# EAGLE board schematic (EAGLE 8.7.1), part 1 of 2
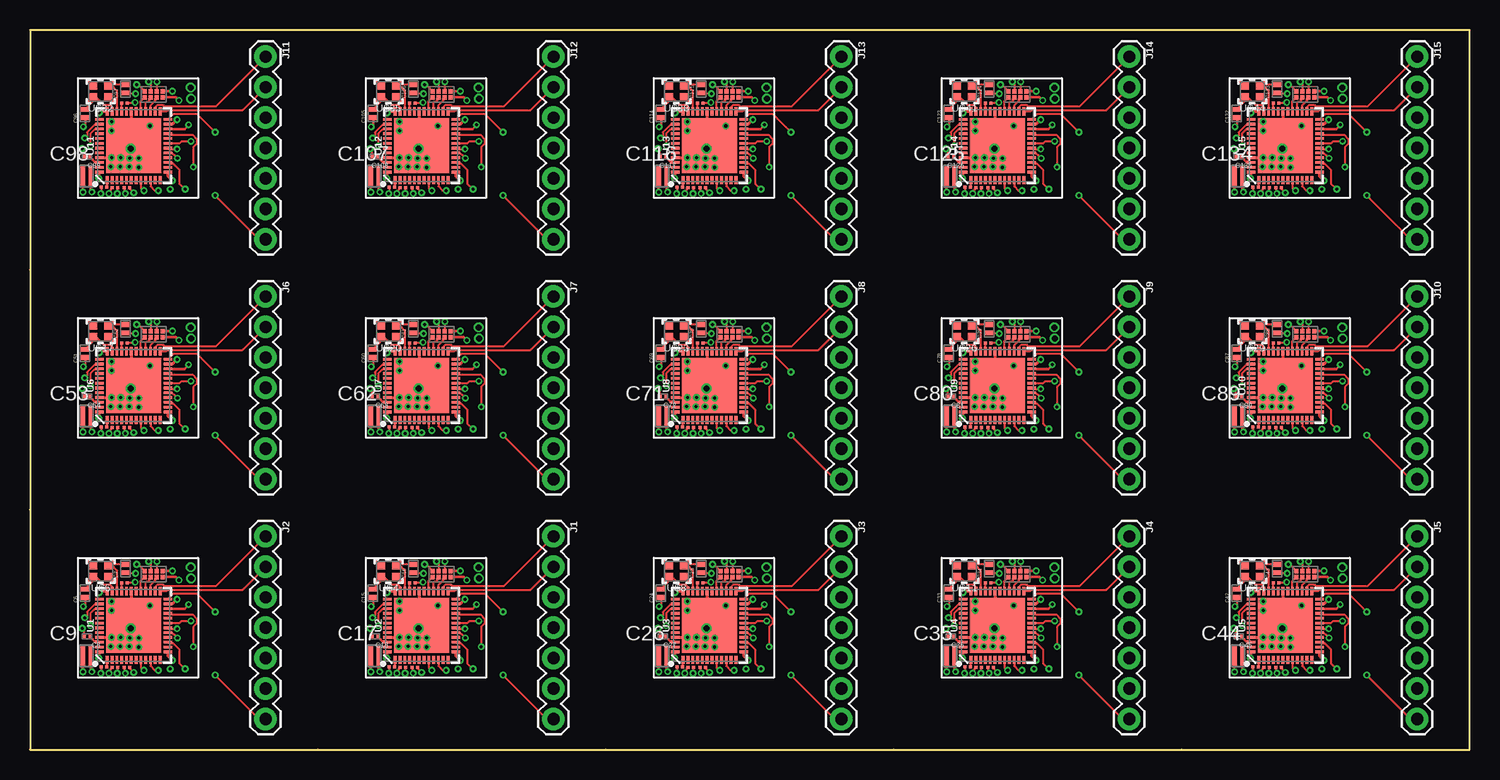
[diagram p0: board, top side]
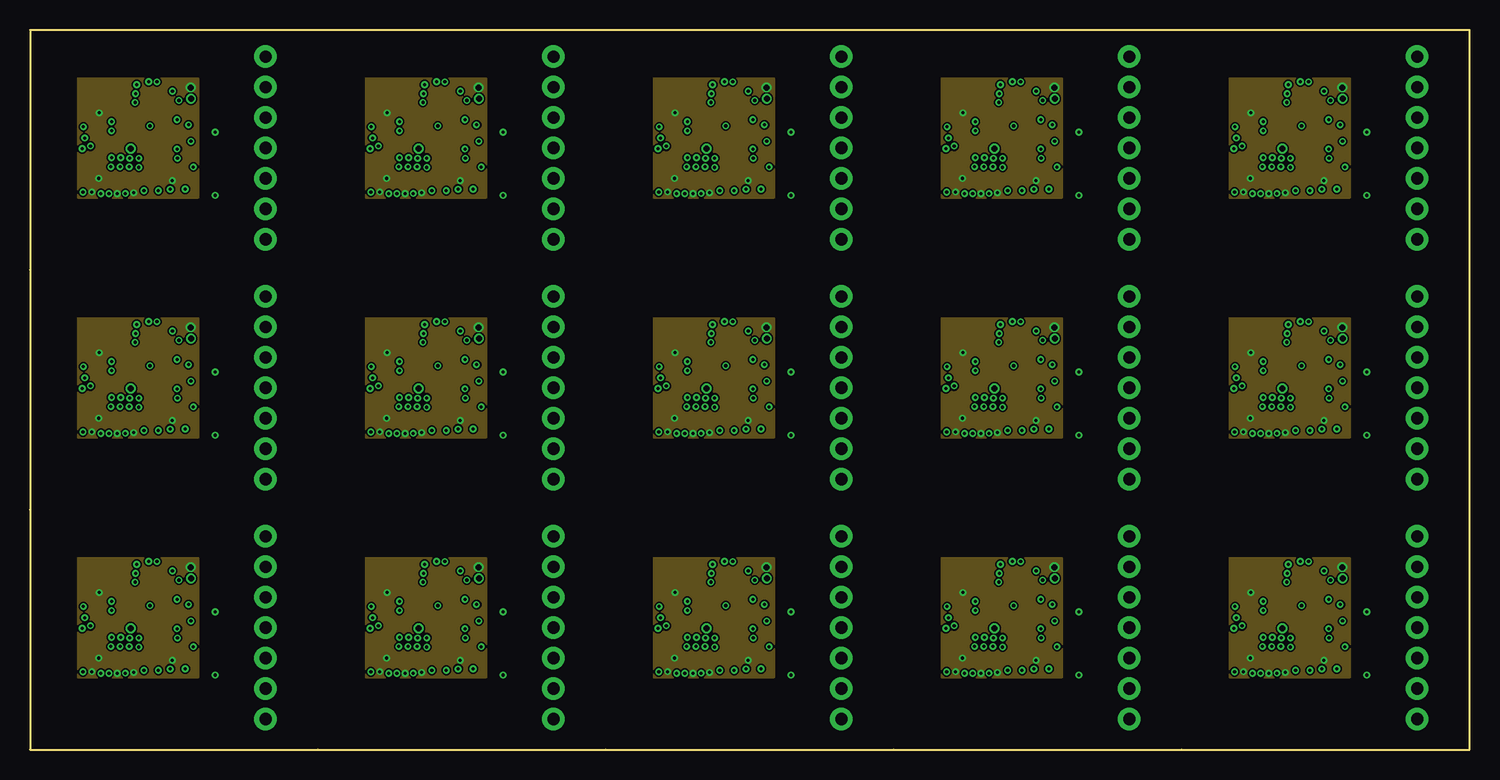
[diagram p1: board, inner layer Route8]
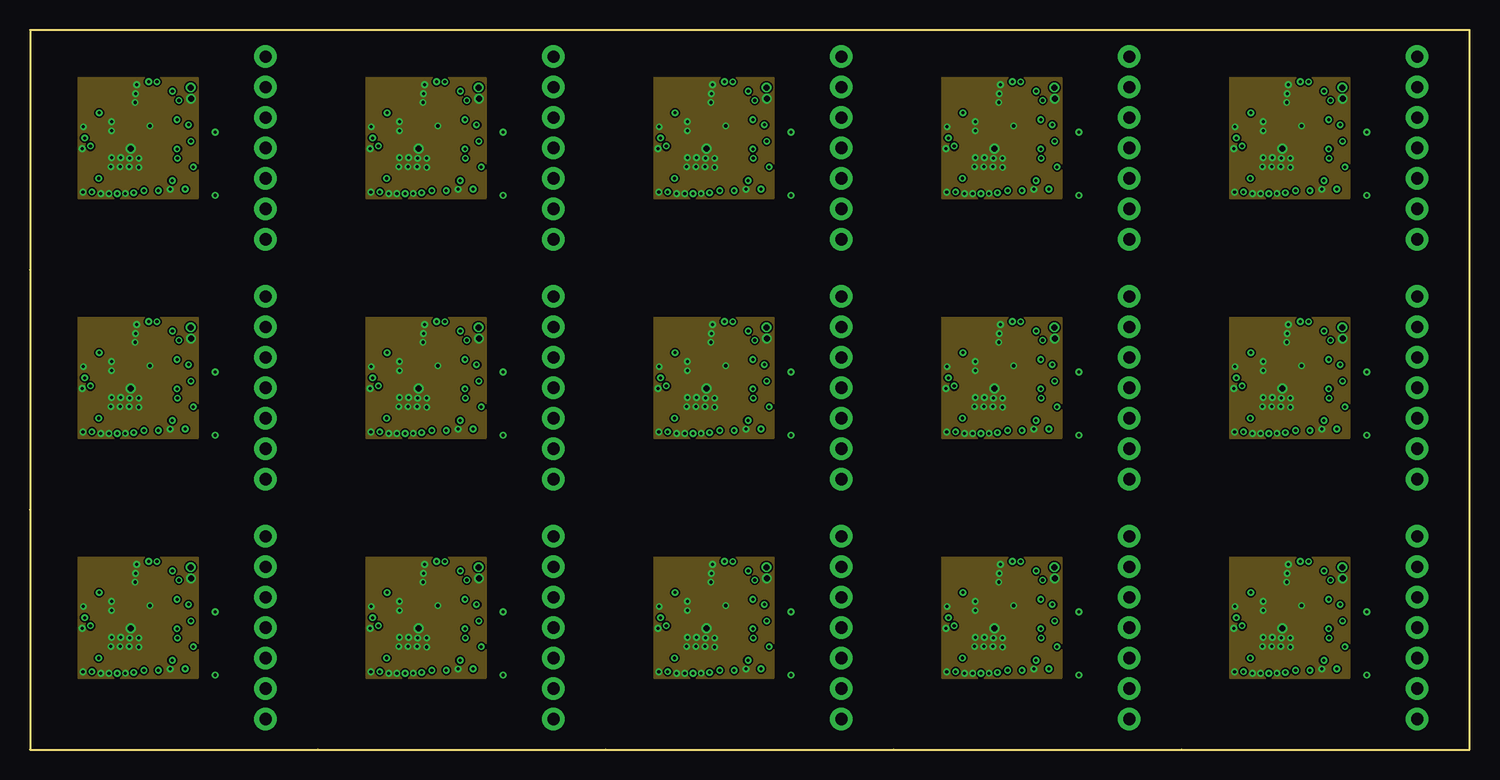
[diagram p2: board, inner layer Route10]
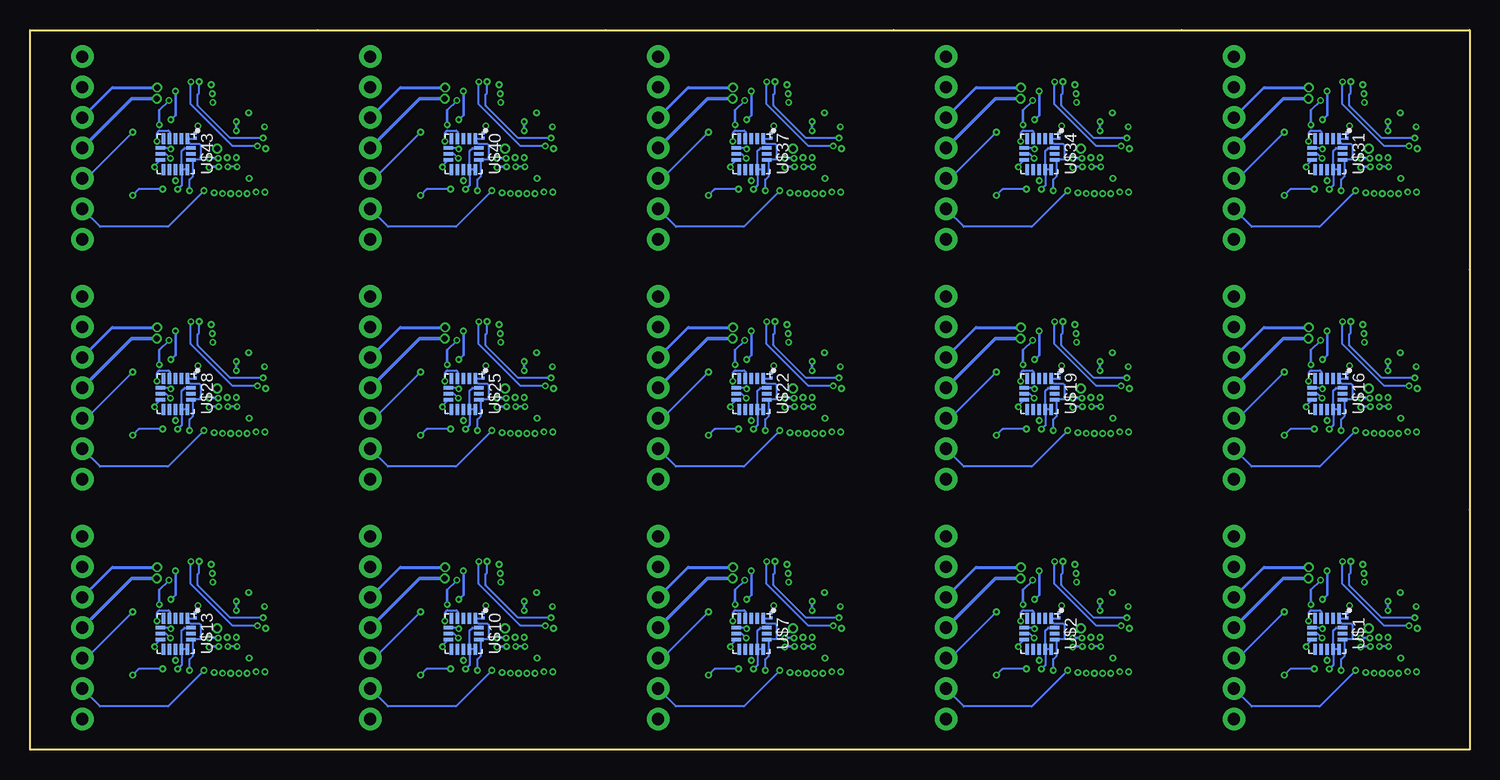
[diagram p3: board, bottom side, seen from below]

Size 120 x 60 mm. Coordinates in mm from the lower left corner, seen from the top.
Outline: 0,0 24,0 48,0 72,0 96,0 120,0 120,20 120,40 120,60 96,60 72,60 48,60 24,60 0,60 0,40 0,20 0,0
Copper layers (1*8*10*16): Top 0.035mm / dielectric 0.42mm / Route8 0.035mm / dielectric 0.62mm / Route10 0.035mm / dielectric 0.42mm / Bottom 0.035mm
Design rules "default *": minimum track width 6mil, minimum drill 10mil, track to track 5mil, track to pad 5mil, pad to pad 5mil, via to via 5mil, smd to smd 2mil, copper to edge 40mil, drill to drill 6mil, minimum pad ring 10mil, minimum via ring 6mil, stop-mask expansion 4mil, vias tented up to drill 0mil, thermal gap 10mil

## Footprints (pad centres in the part's own frame; a part is rotated, then mirrored left to right if it is on the bottom)
CAP_0402-L = smd 0.25 x 0.25: 1 -0.229,0; 2 0.229,0
CAPC1005X55N = smd 0.4 x 0.6: 1 -0.4,0; 2 0.3,0
CAPC0502X28N = smd 0.25 x 0.3: 1 -0.3,0; 2 0.2,0
4P7UFCAPACITOR = smd 0.35 x 1.6: 1 -0.4,0.1; 2 0.25,0.1
1X07 = drill 1.016 pad 1.88: 1 0,0; 2 2.54,0; 3 5.08,0; 4 7.62,0; 5 10.16,0; 6 12.7,0; 7 15.24,0
QFN48-6X6MM = smd 0.68 x 0.23: 1 -2.86,2.2; 2 -2.86,1.8; 3 -2.86,1.4; 4 -2.86,1; 5 -2.86,0.6; 6 -2.86,0.2; 7 -2.86,-0.2; 8 -2.86,-0.6; 9 -2.86,-1; 10 -2.86,-1.4; 11 -2.86,-1.8; 12 -2.86,-2.2; 25 2.86,-2.2; 26 2.86,-1.8; 27 2.86,-1.4; 28 2.86,-1; 29 2.86,-0.6; 30 2.86,-0.2; 31 2.86,0.2; 32 2.86,0.6; 33 2.86,1; 34 2.86,1.4; 35 2.86,1.8; 36 2.86,2.2 | smd 0.23 x 0.68: 13 -2.2,-2.86; 14 -1.8,-2.86; 15 -1.4,-2.86; 16 -1,-2.86; 17 -0.6,-2.86; 18 -0.2,-2.86; 19 0.2,-2.86; 20 0.6,-2.86; 21 1,-2.86; 22 1.4,-2.86; 23 1.8,-2.86; 24 2.2,-2.86; 37 2.2,2.86; 38 1.8,2.86; 39 1.4,2.86; 40 1,2.86; 41 0.6,2.86; 42 0.2,2.86; 43 -0.2,2.86; 44 -0.6,2.86; 45 -1,2.86; 46 -1.4,2.86; 47 -1.8,2.86; 48 -2.2,2.86 | smd 4.6 x 4.6: EP 0,0
TFLGA-16/3.3MMX3.1MM = smd 0.3 x 0.8: CS 0.5,-1.275; GND@3 -0.5,1.275; MISO 0,-1.275; MOSI -0.5,-1.275; NC@2 0,1.275; VS 0.5,1.275 | smd 0.925 x 0.3: GND@1 1.288,0.5; GND@2 1.288,1; INT1 1.288,0; INT2 1.288,-1; NC@1 -1.288,0.5; RESERVED@1 -1.288,0; RESERVED@2 -1.288,-1; RESERVED@3 1.288,-0.5; SCLK -1.288,-0.5; VDD/IO -1.288,1
AT25SF161-UUD-T = smd 0.35 x 0.35: 1 1.2,0.9; 2 1.2,0.4; 3 1.2,-0.1; 4 1.2,-0.6; 5 0.7,0.9; 6 0.7,0.4; 7 0.7,-0.1; 8 0.7,-0.6
32MHZCRYSTAL = smd 0.75 x 0.7: 1 0.485,0.47; 2 1.835,0.47; 3 1.835,1.47; 4 0.485,1.47

## Placement (x,y rotation side)
C1  C0402X5R0G104M020BCCAP_0402-L  [CAP_0402-L]  10.24,11.19 270 bottom
C2  C0402X5R0G104M020BCCAP_0402-L  [CAP_0402-L]  6.19,6.88 180 top
C3  C0402X5R0G104M020BCCAP_0402-L  [CAP_0402-L]  8.07,6.87 0 top
C4  C0402X5R0G104M020BCCAP_0402-L  [CAP_0402-L]  7.09,6.87 0 top
C5  C0402C0G1C101J020BCCAP_0402-L  [CAP_0402-L]  7.86,13.88 0 top
C6  GRM1555C1H6R0CA01D  [CAPC1005X55N]  4.59,13.08 90 top
C7  GRM1555C1H6R0CA01D  [CAPC1005X55N]  7.96,15.14 90 top
C8  GRMMDXR60J105ME05D  [CAPC0502X28N]  4.7,9.43 180 top
C9  4P7UFCAPACITOR4P7UFCAPACITOR  [4P7UFCAPACITOR]  4.82,7.72 0 top
C10  C0402X5R0G104M020BCCAP_0402-L  [CAP_0402-L]  34.24,11.19 270 bottom
C11  C0402X5R0G104M020BCCAP_0402-L  [CAP_0402-L]  30.19,6.88 180 top
C12  C0402X5R0G104M020BCCAP_0402-L  [CAP_0402-L]  32.07,6.87 0 top
C13  C0402X5R0G104M020BCCAP_0402-L  [CAP_0402-L]  31.09,6.87 0 top
C14  C0402C0G1C101J020BCCAP_0402-L  [CAP_0402-L]  31.86,13.88 0 top
C15  GRM1555C1H6R0CA01D  [CAPC1005X55N]  28.59,13.08 90 top
C16  GRM1555C1H6R0CA01D  [CAPC1005X55N]  31.96,15.14 90 top
C17  4P7UFCAPACITOR4P7UFCAPACITOR  [4P7UFCAPACITOR]  28.82,7.72 0 top
C18  GRMMDXR60J105ME05D  [CAPC0502X28N]  28.7,9.43 180 top
C19  C0402X5R0G104M020BCCAP_0402-L  [CAP_0402-L]  58.24,11.19 270 bottom
C20  C0402X5R0G104M020BCCAP_0402-L  [CAP_0402-L]  54.19,6.88 180 top
C21  C0402X5R0G104M020BCCAP_0402-L  [CAP_0402-L]  56.07,6.87 0 top
C22  C0402X5R0G104M020BCCAP_0402-L  [CAP_0402-L]  55.09,6.87 0 top
C23  C0402C0G1C101J020BCCAP_0402-L  [CAP_0402-L]  55.86,13.88 0 top
C24  GRM1555C1H6R0CA01D  [CAPC1005X55N]  52.59,13.08 90 top
C25  GRM1555C1H6R0CA01D  [CAPC1005X55N]  55.96,15.14 90 top
C26  4P7UFCAPACITOR4P7UFCAPACITOR  [4P7UFCAPACITOR]  52.82,7.72 0 top
C27  GRMMDXR60J105ME05D  [CAPC0502X28N]  52.7,9.43 180 top
C28  C0402X5R0G104M020BCCAP_0402-L  [CAP_0402-L]  82.24,11.19 270 bottom
C29  C0402X5R0G104M020BCCAP_0402-L  [CAP_0402-L]  78.19,6.88 180 top
C30  C0402X5R0G104M020BCCAP_0402-L  [CAP_0402-L]  80.07,6.87 0 top
C31  C0402X5R0G104M020BCCAP_0402-L  [CAP_0402-L]  79.09,6.87 0 top
C32  C0402C0G1C101J020BCCAP_0402-L  [CAP_0402-L]  79.86,13.88 0 top
C33  GRM1555C1H6R0CA01D  [CAPC1005X55N]  76.59,13.08 90 top
C34  GRM1555C1H6R0CA01D  [CAPC1005X55N]  79.96,15.14 90 top
C35  4P7UFCAPACITOR4P7UFCAPACITOR  [4P7UFCAPACITOR]  76.82,7.72 0 top
C36  GRMMDXR60J105ME05D  [CAPC0502X28N]  76.7,9.43 180 top
C37  C0402X5R0G104M020BCCAP_0402-L  [CAP_0402-L]  106.24,11.19 270 bottom
C38  C0402X5R0G104M020BCCAP_0402-L  [CAP_0402-L]  102.19,6.88 180 top
C39  C0402X5R0G104M020BCCAP_0402-L  [CAP_0402-L]  104.07,6.87 0 top
C40  C0402X5R0G104M020BCCAP_0402-L  [CAP_0402-L]  103.09,6.87 0 top
C41  C0402C0G1C101J020BCCAP_0402-L  [CAP_0402-L]  103.86,13.88 0 top
C42  GRM1555C1H6R0CA01D  [CAPC1005X55N]  100.59,13.08 90 top
C43  GRM1555C1H6R0CA01D  [CAPC1005X55N]  103.96,15.14 90 top
C44  4P7UFCAPACITOR4P7UFCAPACITOR  [4P7UFCAPACITOR]  100.82,7.72 0 top
C45  GRMMDXR60J105ME05D  [CAPC0502X28N]  100.7,9.43 180 top
C46  C0402X5R0G104M020BCCAP_0402-L  [CAP_0402-L]  10.24,31.19 270 bottom
C47  C0402X5R0G104M020BCCAP_0402-L  [CAP_0402-L]  6.19,26.88 180 top
C48  C0402X5R0G104M020BCCAP_0402-L  [CAP_0402-L]  8.07,26.87 0 top
C49  C0402X5R0G104M020BCCAP_0402-L  [CAP_0402-L]  7.09,26.87 0 top
C50  C0402C0G1C101J020BCCAP_0402-L  [CAP_0402-L]  7.86,33.88 0 top
C51  GRM1555C1H6R0CA01D  [CAPC1005X55N]  4.59,33.08 90 top
C52  GRM1555C1H6R0CA01D  [CAPC1005X55N]  7.96,35.14 90 top
C53  4P7UFCAPACITOR4P7UFCAPACITOR  [4P7UFCAPACITOR]  4.82,27.72 0 top
C54  GRMMDXR60J105ME05D  [CAPC0502X28N]  4.7,29.43 180 top
C55  C0402X5R0G104M020BCCAP_0402-L  [CAP_0402-L]  34.24,31.19 270 bottom
C56  C0402X5R0G104M020BCCAP_0402-L  [CAP_0402-L]  30.19,26.88 180 top
C57  C0402X5R0G104M020BCCAP_0402-L  [CAP_0402-L]  32.07,26.87 0 top
C58  C0402X5R0G104M020BCCAP_0402-L  [CAP_0402-L]  31.09,26.87 0 top
C59  C0402C0G1C101J020BCCAP_0402-L  [CAP_0402-L]  31.86,33.88 0 top
C60  GRM1555C1H6R0CA01D  [CAPC1005X55N]  28.59,33.08 90 top
C61  GRM1555C1H6R0CA01D  [CAPC1005X55N]  31.96,35.14 90 top
C62  4P7UFCAPACITOR4P7UFCAPACITOR  [4P7UFCAPACITOR]  28.82,27.72 0 top
C63  GRMMDXR60J105ME05D  [CAPC0502X28N]  28.7,29.43 180 top
C64  C0402X5R0G104M020BCCAP_0402-L  [CAP_0402-L]  58.24,31.19 270 bottom
C65  C0402X5R0G104M020BCCAP_0402-L  [CAP_0402-L]  54.19,26.88 180 top
C66  C0402X5R0G104M020BCCAP_0402-L  [CAP_0402-L]  56.07,26.87 0 top
C67  C0402X5R0G104M020BCCAP_0402-L  [CAP_0402-L]  55.09,26.87 0 top
C68  C0402C0G1C101J020BCCAP_0402-L  [CAP_0402-L]  55.86,33.88 0 top
C69  GRM1555C1H6R0CA01D  [CAPC1005X55N]  52.59,33.08 90 top
C70  GRM1555C1H6R0CA01D  [CAPC1005X55N]  55.96,35.14 90 top
C71  4P7UFCAPACITOR4P7UFCAPACITOR  [4P7UFCAPACITOR]  52.82,27.72 0 top
C72  GRMMDXR60J105ME05D  [CAPC0502X28N]  52.7,29.43 180 top
C73  C0402X5R0G104M020BCCAP_0402-L  [CAP_0402-L]  82.24,31.19 270 bottom
C74  C0402X5R0G104M020BCCAP_0402-L  [CAP_0402-L]  78.19,26.88 180 top
C75  C0402X5R0G104M020BCCAP_0402-L  [CAP_0402-L]  80.07,26.87 0 top
C76  C0402X5R0G104M020BCCAP_0402-L  [CAP_0402-L]  79.09,26.87 0 top
C77  C0402C0G1C101J020BCCAP_0402-L  [CAP_0402-L]  79.86,33.88 0 top
C78  GRM1555C1H6R0CA01D  [CAPC1005X55N]  76.59,33.08 90 top
C79  GRM1555C1H6R0CA01D  [CAPC1005X55N]  79.96,35.14 90 top
C80  4P7UFCAPACITOR4P7UFCAPACITOR  [4P7UFCAPACITOR]  76.82,27.72 0 top
C81  GRMMDXR60J105ME05D  [CAPC0502X28N]  76.7,29.43 180 top
C82  C0402X5R0G104M020BCCAP_0402-L  [CAP_0402-L]  106.24,31.19 270 bottom
C83  C0402X5R0G104M020BCCAP_0402-L  [CAP_0402-L]  102.19,26.88 180 top
C84  C0402X5R0G104M020BCCAP_0402-L  [CAP_0402-L]  104.07,26.87 0 top
C85  C0402X5R0G104M020BCCAP_0402-L  [CAP_0402-L]  103.09,26.87 0 top
C86  C0402C0G1C101J020BCCAP_0402-L  [CAP_0402-L]  103.86,33.88 0 top
C87  GRM1555C1H6R0CA01D  [CAPC1005X55N]  100.59,33.08 90 top
C88  GRM1555C1H6R0CA01D  [CAPC1005X55N]  103.96,35.14 90 top
C89  4P7UFCAPACITOR4P7UFCAPACITOR  [4P7UFCAPACITOR]  100.82,27.72 0 top
C90  GRMMDXR60J105ME05D  [CAPC0502X28N]  100.7,29.43 180 top
C91  C0402X5R0G104M020BCCAP_0402-L  [CAP_0402-L]  10.24,51.19 270 bottom
C92  C0402X5R0G104M020BCCAP_0402-L  [CAP_0402-L]  6.19,46.88 180 top
C93  C0402X5R0G104M020BCCAP_0402-L  [CAP_0402-L]  8.07,46.87 0 top
C94  C0402X5R0G104M020BCCAP_0402-L  [CAP_0402-L]  7.09,46.87 0 top
C95  C0402C0G1C101J020BCCAP_0402-L  [CAP_0402-L]  7.86,53.88 0 top
C96  GRM1555C1H6R0CA01D  [CAPC1005X55N]  4.59,53.08 90 top
C97  GRM1555C1H6R0CA01D  [CAPC1005X55N]  7.96,55.14 90 top
C98  4P7UFCAPACITOR4P7UFCAPACITOR  [4P7UFCAPACITOR]  4.82,47.72 0 top
C99  GRMMDXR60J105ME05D  [CAPC0502X28N]  4.7,49.43 180 top
C100  C0402X5R0G104M020BCCAP_0402-L  [CAP_0402-L]  34.24,51.19 270 bottom
C101  C0402X5R0G104M020BCCAP_0402-L  [CAP_0402-L]  30.19,46.88 180 top
C102  C0402X5R0G104M020BCCAP_0402-L  [CAP_0402-L]  32.07,46.87 0 top
C103  C0402X5R0G104M020BCCAP_0402-L  [CAP_0402-L]  31.09,46.87 0 top
C104  C0402C0G1C101J020BCCAP_0402-L  [CAP_0402-L]  31.86,53.88 0 top
C105  GRM1555C1H6R0CA01D  [CAPC1005X55N]  28.59,53.08 90 top
C106  GRM1555C1H6R0CA01D  [CAPC1005X55N]  31.96,55.14 90 top
C107  4P7UFCAPACITOR4P7UFCAPACITOR  [4P7UFCAPACITOR]  28.82,47.72 0 top
C108  GRMMDXR60J105ME05D  [CAPC0502X28N]  28.7,49.43 180 top
C109  C0402X5R0G104M020BCCAP_0402-L  [CAP_0402-L]  58.24,51.19 270 bottom
C110  C0402X5R0G104M020BCCAP_0402-L  [CAP_0402-L]  54.19,46.88 180 top
C111  C0402X5R0G104M020BCCAP_0402-L  [CAP_0402-L]  56.07,46.87 0 top
C112  C0402X5R0G104M020BCCAP_0402-L  [CAP_0402-L]  55.09,46.87 0 top
C113  C0402C0G1C101J020BCCAP_0402-L  [CAP_0402-L]  55.86,53.88 0 top
C114  GRM1555C1H6R0CA01D  [CAPC1005X55N]  52.59,53.08 90 top
C115  GRM1555C1H6R0CA01D  [CAPC1005X55N]  55.96,55.14 90 top
C116  4P7UFCAPACITOR4P7UFCAPACITOR  [4P7UFCAPACITOR]  52.82,47.72 0 top
C117  GRMMDXR60J105ME05D  [CAPC0502X28N]  52.7,49.43 180 top
C118  C0402X5R0G104M020BCCAP_0402-L  [CAP_0402-L]  82.24,51.19 270 bottom
C119  C0402X5R0G104M020BCCAP_0402-L  [CAP_0402-L]  78.19,46.88 180 top
C120  C0402X5R0G104M020BCCAP_0402-L  [CAP_0402-L]  80.07,46.87 0 top
C121  C0402X5R0G104M020BCCAP_0402-L  [CAP_0402-L]  79.09,46.87 0 top
C122  C0402C0G1C101J020BCCAP_0402-L  [CAP_0402-L]  79.86,53.88 0 top
C123  GRM1555C1H6R0CA01D  [CAPC1005X55N]  76.59,53.08 90 top
C124  GRM1555C1H6R0CA01D  [CAPC1005X55N]  79.96,55.14 90 top
C125  4P7UFCAPACITOR4P7UFCAPACITOR  [4P7UFCAPACITOR]  76.82,47.72 0 top
C126  GRMMDXR60J105ME05D  [CAPC0502X28N]  76.7,49.43 180 top
C127  C0402X5R0G104M020BCCAP_0402-L  [CAP_0402-L]  106.24,51.19 270 bottom
C128  C0402X5R0G104M020BCCAP_0402-L  [CAP_0402-L]  102.19,46.88 180 top
C129  C0402X5R0G104M020BCCAP_0402-L  [CAP_0402-L]  104.07,46.87 0 top
C130  C0402X5R0G104M020BCCAP_0402-L  [CAP_0402-L]  103.09,46.87 0 top
C131  C0402C0G1C101J020BCCAP_0402-L  [CAP_0402-L]  103.86,53.88 0 top
C132  GRM1555C1H6R0CA01D  [CAPC1005X55N]  100.59,53.08 90 top
C133  GRM1555C1H6R0CA01D  [CAPC1005X55N]  103.96,55.14 90 top
C134  4P7UFCAPACITOR4P7UFCAPACITOR  [4P7UFCAPACITOR]  100.82,47.72 0 top
C135  GRMMDXR60J105ME05D  [CAPC0502X28N]  100.7,49.43 180 top
J1  header  [1X07]  43.64,17.78 270 top
J2  header  [1X07]  19.64,17.78 270 top
J3  header  [1X07]  67.64,17.78 270 top
J4  header  [1X07]  91.64,17.78 270 top
J5  header  [1X07]  115.64,17.78 270 top
J6  header  [1X07]  19.64,37.78 270 top
J7  header  [1X07]  43.64,37.78 270 top
J8  header  [1X07]  67.64,37.78 270 top
J9  header  [1X07]  91.64,37.78 270 top
J10  header  [1X07]  115.64,37.78 270 top
J11  header  [1X07]  19.64,57.78 270 top
J12  header  [1X07]  43.64,57.78 270 top
J13  header  [1X07]  67.64,57.78 270 top
J14  header  [1X07]  91.64,57.78 270 top
J15  header  [1X07]  115.64,57.78 270 top
U1  NRF52832  [QFN48-6X6MM]  8.65,10.35 90 top
U2  NRF52832  [QFN48-6X6MM]  32.65,10.35 90 top
U3  NRF52832  [QFN48-6X6MM]  56.65,10.35 90 top
U4  NRF52832  [QFN48-6X6MM]  80.65,10.35 90 top
U5  NRF52832  [QFN48-6X6MM]  104.65,10.35 90 top
U6  NRF52832  [QFN48-6X6MM]  8.65,30.35 90 top
U7  NRF52832  [QFN48-6X6MM]  32.65,30.35 90 top
U8  NRF52832  [QFN48-6X6MM]  56.65,30.35 90 top
U9  NRF52832  [QFN48-6X6MM]  80.65,30.35 90 top
U10  NRF52832  [QFN48-6X6MM]  104.65,30.35 90 top
U11  NRF52832  [QFN48-6X6MM]  8.65,50.35 90 top
U12  NRF52832  [QFN48-6X6MM]  32.65,50.35 90 top
U13  NRF52832  [QFN48-6X6MM]  56.65,50.35 90 top
U14  NRF52832  [QFN48-6X6MM]  80.65,50.35 90 top
U15  NRF52832  [QFN48-6X6MM]  104.65,50.35 90 top
U$1  ADXL362  [TFLGA-16/3.3MMX3.1MM]  11.86,9.66 270 bottom
U$2  ADXL362  [TFLGA-16/3.3MMX3.1MM]  35.86,9.66 270 bottom
U$3  AT25SF161-UUD-T  [AT25SF161-UUD-T]  10.17,15.58 270 top
U$4  32MHZCRYSTAL  [32MHZCRYSTAL]  31.05,15.85 180 top
U$5  AT25SF161-UUD-T  [AT25SF161-UUD-T]  34.17,15.58 270 top
U$6  32MHZCRYSTAL  [32MHZCRYSTAL]  7.05,15.85 180 top
U$7  ADXL362  [TFLGA-16/3.3MMX3.1MM]  59.86,9.66 270 bottom
U$8  32MHZCRYSTAL  [32MHZCRYSTAL]  55.05,15.85 180 top
U$9  AT25SF161-UUD-T  [AT25SF161-UUD-T]  58.17,15.58 270 top
U$10  ADXL362  [TFLGA-16/3.3MMX3.1MM]  83.86,9.66 270 bottom
U$11  32MHZCRYSTAL  [32MHZCRYSTAL]  79.05,15.85 180 top
U$12  AT25SF161-UUD-T  [AT25SF161-UUD-T]  82.17,15.58 270 top
U$13  ADXL362  [TFLGA-16/3.3MMX3.1MM]  107.86,9.66 270 bottom
U$14  32MHZCRYSTAL  [32MHZCRYSTAL]  103.05,15.85 180 top
U$15  AT25SF161-UUD-T  [AT25SF161-UUD-T]  106.17,15.58 270 top
U$16  ADXL362  [TFLGA-16/3.3MMX3.1MM]  11.86,29.66 270 bottom
U$17  32MHZCRYSTAL  [32MHZCRYSTAL]  7.05,35.85 180 top
U$18  AT25SF161-UUD-T  [AT25SF161-UUD-T]  10.17,35.58 270 top
U$19  ADXL362  [TFLGA-16/3.3MMX3.1MM]  35.86,29.66 270 bottom
U$20  32MHZCRYSTAL  [32MHZCRYSTAL]  31.05,35.85 180 top
U$21  AT25SF161-UUD-T  [AT25SF161-UUD-T]  34.17,35.58 270 top
U$22  ADXL362  [TFLGA-16/3.3MMX3.1MM]  59.86,29.66 270 bottom
U$23  32MHZCRYSTAL  [32MHZCRYSTAL]  55.05,35.85 180 top
U$24  AT25SF161-UUD-T  [AT25SF161-UUD-T]  58.17,35.58 270 top
U$25  ADXL362  [TFLGA-16/3.3MMX3.1MM]  83.86,29.66 270 bottom
U$26  32MHZCRYSTAL  [32MHZCRYSTAL]  79.05,35.85 180 top
U$27  AT25SF161-UUD-T  [AT25SF161-UUD-T]  82.17,35.58 270 top
U$28  ADXL362  [TFLGA-16/3.3MMX3.1MM]  107.86,29.66 270 bottom
U$29  32MHZCRYSTAL  [32MHZCRYSTAL]  103.05,35.85 180 top
U$30  AT25SF161-UUD-T  [AT25SF161-UUD-T]  106.17,35.58 270 top
U$31  ADXL362  [TFLGA-16/3.3MMX3.1MM]  11.86,49.66 270 bottom
U$32  32MHZCRYSTAL  [32MHZCRYSTAL]  7.05,55.85 180 top
U$33  AT25SF161-UUD-T  [AT25SF161-UUD-T]  10.17,55.58 270 top
U$34  ADXL362  [TFLGA-16/3.3MMX3.1MM]  35.86,49.66 270 bottom
U$35  32MHZCRYSTAL  [32MHZCRYSTAL]  31.05,55.85 180 top
U$36  AT25SF161-UUD-T  [AT25SF161-UUD-T]  34.17,55.58 270 top
U$37  ADXL362  [TFLGA-16/3.3MMX3.1MM]  59.86,49.66 270 bottom
U$38  32MHZCRYSTAL  [32MHZCRYSTAL]  55.05,55.85 180 top
U$39  AT25SF161-UUD-T  [AT25SF161-UUD-T]  58.17,55.58 270 top
U$40  ADXL362  [TFLGA-16/3.3MMX3.1MM]  83.86,49.66 270 bottom
U$41  32MHZCRYSTAL  [32MHZCRYSTAL]  79.05,55.85 180 top
U$42  AT25SF161-UUD-T  [AT25SF161-UUD-T]  82.17,55.58 270 top
U$43  ADXL362  [TFLGA-16/3.3MMX3.1MM]  107.86,49.66 270 bottom
U$44  32MHZCRYSTAL  [32MHZCRYSTAL]  103.05,55.85 180 top
U$45  AT25SF161-UUD-T  [AT25SF161-UUD-T]  106.17,55.58 270 top

## Library data of the parts
C1-C4 C10-C13 C19-C22 C28-C31 C37-C40 C46-C49 C55-C58 C64-C67 C73-C76 C82-C85 C91-C94 C100-C103 C109-C112 C118-C121 C127-C130 = 0p1_uF_capacitor; MANUFACTURER_PART_NUMBER: C0402C0G1C101J020BC; VENDOR: TDK
C5 C14 C23 C32 C41 C50 C59 C68 C77 C86 C95 C104 C113 C122 C131 = 100_pF_capacitor; MANUFACTURER_PART_NUMBER: C0402C0G1C101J020BC; VENDOR: TDK
C6 C7 C15 C16 C24 C25 C33 C34 C42 C43 C51 C52 C60 C61 C69 C70 C78 C79 C87 C88 C96 C97 C105 C106 C114 C115 C123 C124 C132 C133 = 6pf_capacitor_new-bigger; DESCRIPTION: 0402 6 pF 50 V ±0.25 pF Tolerance C0G SMT Multilayer Ceramic Capacitor; DIGI-KEY_PART_NUMBER: 490-8222-1-ND; DIGI-KEY_PURCHASE_URL: https://www.digikey.com/product-detail/en/murata-electronics-north-america/GRM1555C1H6R0CA01D/490-8222-1-ND/4380516?WT.z_cid=ref_snapeda&utm_source=snapeda&utm_medium=aggregator&utm_campaign=buynow; MF: Murata; MP: GRM1555C1H6R0CA01D; PACKAGE: 0402 Murata
C8 C18 C27 C36 C45 C54 C63 C72 C81 C90 C99 C108 C117 C126 C135 = 1UFCAPACITOR; DESCRIPTION: Cap, Mlcc, X5r, 1uf, 6.3v, 015008; DIGI-KEY_PART_NUMBER: 490-13424-1-ND; DIGI-KEY_PURCHASE_URL: https://www.digikey.com/product-detail/en/murata-electronics-north-america/GRMMDXR60J105ME05D/490-13424-1-ND/6023636?WT.z_cid=ref_snapeda&utm_source=snapeda&utm_medium=aggregator&utm_campaign=buynow; MF: Murata; MP: GRMMDXR60J105ME05D; PACKAGE: 015008 Murata
C9 C17 C26 C35 C44 C53 C62 C71 C80 C89 C98 C107 C116 C125 C134 = 4p7_uF_capacitor; MANUFACTURER_PART_NUMBER: C0816X5R0J475M050AC; VENDOR: TDK
J1-J15 = SparkFun-Connectors
U1-U15 = nrf52832-breakout-temp; PROD_ID: IC-13460
U$1 U$2 U$7 U$10 U$13 U$16 U$19 U$22 U$25 U$28 U$31 U$34 U$37 U$40 U$43 = ADXL362
U$3 U$5 U$9 U$12 U$15 U$18 U$21 U$24 U$27 U$30 U$33 U$36 U$39 U$42 U$45 = AT25SF161-UUD-T
U$4 U$6 U$8 U$11 U$14 U$17 U$20 U$23 U$26 U$29 U$32 U$35 U$38 U$41 U$44 = 32_mhz_crystal

## Nets
ADXL_POWER-QFAA: C1.2 U1.10 U$1.VDD/IO U$1.VS
ADXL_POWER-QFAA1: C10.2 U2.10 U$2.VDD/IO U$2.VS
ADXL_POWER-QFAA2: C19.2 U3.10 U$7.VDD/IO U$7.VS
ADXL_POWER-QFAA3: C28.2 U4.10 U$10.VDD/IO U$10.VS
ADXL_POWER-QFAA4: C37.2 U5.10 U$13.VDD/IO U$13.VS
ADXL_POWER-QFAA5: C46.2 U6.10 U$16.VDD/IO U$16.VS
ADXL_POWER-QFAA6: C55.2 U7.10 U$19.VDD/IO U$19.VS
ADXL_POWER-QFAA7: C64.2 U8.10 U$22.VDD/IO U$22.VS
ADXL_POWER-QFAA8: C73.2 U9.10 U$25.VDD/IO U$25.VS
ADXL_POWER-QFAA9: C82.2 U10.10 U$28.VDD/IO U$28.VS
ADXL_POWER-QFAA10: C91.2 U11.10 U$31.VDD/IO U$31.VS
ADXL_POWER-QFAA11: C100.2 U12.10 U$34.VDD/IO U$34.VS
ADXL_POWER-QFAA12: C109.2 U13.10 U$37.VDD/IO U$37.VS
ADXL_POWER-QFAA13: C118.2 U14.10 U$40.VDD/IO U$40.VS
ADXL_POWER-QFAA14: C127.2 U15.10 U$43.VDD/IO U$43.VS
CS-QFAA: U1.21 U$1.CS
CS-QFAA1: U2.21 U$2.CS
CS-QFAA2: U3.21 U$7.CS
CS-QFAA3: U4.21 U$10.CS
CS-QFAA4: U5.21 U$13.CS
CS-QFAA5: U6.21 U$16.CS
CS-QFAA6: U7.21 U$19.CS
CS-QFAA7: U8.21 U$22.CS
CS-QFAA8: U9.21 U$25.CS
CS-QFAA9: U10.21 U$28.CS
CS-QFAA10: U11.21 U$31.CS
CS-QFAA11: U12.21 U$34.CS
CS-QFAA12: U13.21 U$37.CS
CS-QFAA13: U14.21 U$40.CS
CS-QFAA14: U15.21 U$43.CS
CS_FLASH: U1.23 U$3.5
CS_FLASH1: U2.23 U$5.5
CS_FLASH2: U3.23 U$9.5
CS_FLASH3: U4.23 U$12.5
CS_FLASH4: U5.23 U$15.5
CS_FLASH5: U6.23 U$18.5
CS_FLASH6: U7.23 U$21.5
CS_FLASH7: U8.23 U$24.5
CS_FLASH8: U9.23 U$27.5
CS_FLASH9: U10.23 U$30.5
CS_FLASH10: U11.23 U$33.5
CS_FLASH11: U12.23 U$36.5
CS_FLASH12: U13.23 U$39.5
CS_FLASH13: U14.23 U$42.5
CS_FLASH14: U15.23 U$45.5
DEC1-QFAA: C2.1 U1.1
DEC1-QFAA1: C11.1 U2.1
DEC1-QFAA2: C20.1 U3.1
DEC1-QFAA3: C29.1 U4.1
DEC1-QFAA4: C38.1 U5.1
DEC1-QFAA5: C47.1 U6.1
DEC1-QFAA6: C56.1 U7.1
DEC1-QFAA7: C65.1 U8.1
DEC1-QFAA8: C74.1 U9.1
DEC1-QFAA9: C83.1 U10.1
DEC1-QFAA10: C92.1 U11.1
DEC1-QFAA11: C101.1 U12.1
DEC1-QFAA12: C110.1 U13.1
DEC1-QFAA13: C119.1 U14.1
DEC1-QFAA14: C128.1 U15.1
DEC3-QFAA: C5.1 U1.33
DEC3-QFAA1: C14.1 U2.33
DEC3-QFAA2: C23.1 U3.33
DEC3-QFAA3: C32.1 U4.33
DEC3-QFAA4: C41.1 U5.33
DEC3-QFAA5: C50.1 U6.33
DEC3-QFAA6: C59.1 U7.33
DEC3-QFAA7: C68.1 U8.33
DEC3-QFAA8: C77.1 U9.33
DEC3-QFAA9: C86.1 U10.33
DEC3-QFAA10: C95.1 U11.33
DEC3-QFAA11: C104.1 U12.33
DEC3-QFAA12: C113.1 U13.33
DEC3-QFAA13: C122.1 U14.33
DEC3-QFAA14: C131.1 U15.33
DEC4-QFAA: C8.1 U1.46
DEC4-QFAA1: C18.1 U2.46
DEC4-QFAA2: C27.1 U3.46
DEC4-QFAA3: C36.1 U4.46
DEC4-QFAA4: C45.1 U5.46
DEC4-QFAA5: C54.1 U6.46
DEC4-QFAA6: C63.1 U7.46
DEC4-QFAA7: C72.1 U8.46
DEC4-QFAA8: C81.1 U9.46
DEC4-QFAA9: C90.1 U10.46
DEC4-QFAA10: C99.1 U11.46
DEC4-QFAA11: C108.1 U12.46
DEC4-QFAA12: C117.1 U13.46
DEC4-QFAA13: C126.1 U14.46
DEC4-QFAA14: C135.1 U15.46
FLASH_POWER: U1.22 U$3.1
FLASH_POWER1: U2.22 U$5.1
FLASH_POWER2: U3.22 U$9.1
FLASH_POWER3: U4.22 U$12.1
FLASH_POWER4: U5.22 U$15.1
FLASH_POWER5: U6.22 U$18.1
FLASH_POWER6: U7.22 U$21.1
FLASH_POWER7: U8.22 U$24.1
FLASH_POWER8: U9.22 U$27.1
FLASH_POWER9: U10.22 U$30.1
FLASH_POWER10: U11.22 U$33.1
FLASH_POWER11: U12.22 U$36.1
FLASH_POWER12: U13.22 U$39.1
FLASH_POWER13: U14.22 U$42.1
FLASH_POWER14: U15.22 U$45.1
GND: C1.1 C2.2 C3.1 C4.1 C5.2 C6.1 C7.1 C8.2 C9.1 J2.4 U1.31 U1.45 U1.EP U$1.GND@1 U$1.GND@2 U$1.GND@3 U$3.8
GND1: C10.1 C11.2 C12.1 C13.1 C14.2 C15.1 C16.1 C17.1 C18.2 J1.4 U2.31 U2.45 U2.EP U$2.GND@1 U$2.GND@2 U$2.GND@3 U$5.8
GND2: C19.1 C20.2 C21.1 C22.1 C23.2 C24.1 C25.1 C26.1 C27.2 J3.4 U3.31 U3.45 U3.EP U$7.GND@1 U$7.GND@2 U$7.GND@3 U$9.8
GND3: C28.1 C29.2 C30.1 C31.1 C32.2 C33.1 C34.1 C35.1 C36.2 J4.4 U4.31 U4.45 U4.EP U$10.GND@1 U$10.GND@2 U$10.GND@3 U$12.8
GND4: C37.1 C38.2 C39.1 C40.1 C41.2 C42.1 C43.1 C44.1 C45.2 J5.4 U5.31 U5.45 U5.EP U$13.GND@1 U$13.GND@2 U$13.GND@3 U$15.8
GND5: C46.1 C47.2 C48.1 C49.1 C50.2 C51.1 C52.1 C53.1 C54.2 J6.4 U6.31 U6.45 U6.EP U$16.GND@1 U$16.GND@2 U$16.GND@3 U$18.8
GND6: C55.1 C56.2 C57.1 C58.1 C59.2 C60.1 C61.1 C62.1 C63.2 J7.4 U7.31 U7.45 U7.EP U$19.GND@1 U$19.GND@2 U$19.GND@3 U$21.8
GND7: C64.1 C65.2 C66.1 C67.1 C68.2 C69.1 C70.1 C71.1 C72.2 J8.4 U8.31 U8.45 U8.EP U$22.GND@1 U$22.GND@2 U$22.GND@3 U$24.8
GND8: C73.1 C74.2 C75.1 C76.1 C77.2 C78.1 C79.1 C80.1 C81.2 J9.4 U9.31 U9.45 U9.EP U$25.GND@1 U$25.GND@2 U$25.GND@3 U$27.8
GND9: C82.1 C83.2 C84.1 C85.1 C86.2 C87.1 C88.1 C89.1 C90.2 J10.4 U10.31 U10.45 U10.EP U$28.GND@1 U$28.GND@2 U$28.GND@3 U$30.8
GND10: C91.1 C92.2 C93.1 C94.1 C95.2 C96.1 C97.1 C98.1 C99.2 J11.4 U11.31 U11.45 U11.EP U$31.GND@1 U$31.GND@2 U$31.GND@3 U$33.8
GND11: C100.1 C101.2 C102.1 C103.1 C104.2 C105.1 C106.1 C107.1 C108.2 J12.4 U12.31 U12.45 U12.EP U$34.GND@1 U$34.GND@2 U$34.GND@3 U$36.8
GND12: C109.1 C110.2 C111.1 C112.1 C113.2 C114.1 C115.1 C116.1 C117.2 J13.4 U13.31 U13.45 U13.EP U$37.GND@1 U$37.GND@2 U$37.GND@3 U$39.8
GND13: C118.1 C119.2 C120.1 C121.1 C122.2 C123.1 C124.1 C125.1 C126.2 J14.4 U14.31 U14.45 U14.EP U$40.GND@1 U$40.GND@2 U$40.GND@3 U$42.8
GND14: C127.1 C128.2 C129.1 C130.1 C131.2 C132.1 C133.1 C134.1 C135.2 J15.4 U15.31 U15.45 U15.EP U$43.GND@1 U$43.GND@2 U$43.GND@3 U$45.8
HOLD_FLASH: U1.27 U$3.2
HOLD_FLASH1: U2.27 U$5.2
HOLD_FLASH2: U3.27 U$9.2
HOLD_FLASH3: U4.27 U$12.2
HOLD_FLASH4: U5.27 U$15.2
HOLD_FLASH5: U6.27 U$18.2
HOLD_FLASH6: U7.27 U$21.2
HOLD_FLASH7: U8.27 U$24.2
HOLD_FLASH8: U9.27 U$27.2
HOLD_FLASH9: U10.27 U$30.2
HOLD_FLASH10: U11.27 U$33.2
HOLD_FLASH11: U12.27 U$36.2
HOLD_FLASH12: U13.27 U$39.2
HOLD_FLASH13: U14.27 U$42.2
HOLD_FLASH14: U15.27 U$45.2
MISO-QFAA: U1.17 U$1.MISO
MISO-QFAA1: U2.17 U$2.MISO
MISO-QFAA2: U3.17 U$7.MISO
MISO-QFAA3: U4.17 U$10.MISO
MISO-QFAA4: U5.17 U$13.MISO
MISO-QFAA5: U6.17 U$16.MISO
MISO-QFAA6: U7.17 U$19.MISO
MISO-QFAA7: U8.17 U$22.MISO
MISO-QFAA8: U9.17 U$25.MISO
MISO-QFAA9: U10.17 U$28.MISO
MISO-QFAA10: U11.17 U$31.MISO
MISO-QFAA11: U12.17 U$34.MISO
MISO-QFAA12: U13.17 U$37.MISO
MISO-QFAA13: U14.17 U$40.MISO
MISO-QFAA14: U15.17 U$43.MISO
MOSI-QFAA: U1.18 U$1.MOSI
MOSI-QFAA1: U2.18 U$2.MOSI
MOSI-QFAA2: U3.18 U$7.MOSI
MOSI-QFAA3: U4.18 U$10.MOSI
MOSI-QFAA4: U5.18 U$13.MOSI
MOSI-QFAA5: U6.18 U$16.MOSI
MOSI-QFAA6: U7.18 U$19.MOSI
MOSI-QFAA7: U8.18 U$22.MOSI
MOSI-QFAA8: U9.18 U$25.MOSI
MOSI-QFAA9: U10.18 U$28.MOSI
MOSI-QFAA10: U11.18 U$31.MOSI
MOSI-QFAA11: U12.18 U$34.MOSI
MOSI-QFAA12: U13.18 U$37.MOSI
MOSI-QFAA13: U14.18 U$40.MOSI
MOSI-QFAA14: U15.18 U$43.MOSI
P0.06-QFAA: J2.6 U1.8
P0.06-QFAA1: J1.6 U2.8
P0.06-QFAA2: J3.6 U3.8
P0.06-QFAA3: J4.6 U4.8
P0.06-QFAA4: J5.6 U5.8
P0.06-QFAA5: J6.6 U6.8
P0.06-QFAA6: J7.6 U7.8
P0.06-QFAA7: J8.6 U8.8
P0.06-QFAA8: J9.6 U9.8
P0.06-QFAA9: J10.6 U10.8
P0.06-QFAA10: J11.6 U11.8
P0.06-QFAA11: J12.6 U12.8
P0.06-QFAA12: J13.6 U13.8
P0.06-QFAA13: J14.6 U14.8
P0.06-QFAA14: J15.6 U15.8
P0.12-QFAA: J2.7 U1.15
P0.12-QFAA1: J1.7 U2.15
P0.12-QFAA2: J3.7 U3.15
P0.12-QFAA3: J4.7 U4.15
P0.12-QFAA4: J5.7 U5.15
P0.12-QFAA5: J6.7 U6.15
P0.12-QFAA6: J7.7 U7.15
P0.12-QFAA7: J8.7 U8.15
P0.12-QFAA8: J9.7 U9.15
P0.12-QFAA9: J10.7 U10.15
P0.12-QFAA10: J11.7 U11.15
P0.12-QFAA11: J12.7 U12.15
P0.12-QFAA12: J13.7 U13.15
P0.12-QFAA13: J14.7 U14.15
P0.12-QFAA14: J15.7 U15.15
RESET-QFAA: J2.5 U1.24
RESET-QFAA1: J1.5 U2.24
RESET-QFAA2: J3.5 U3.24
RESET-QFAA3: J4.5 U4.24
RESET-QFAA4: J5.5 U5.24
RESET-QFAA5: J6.5 U6.24
RESET-QFAA6: J7.5 U7.24
RESET-QFAA7: J8.5 U8.24
RESET-QFAA8: J9.5 U9.24
RESET-QFAA9: J10.5 U10.24
RESET-QFAA10: J11.5 U11.24
RESET-QFAA11: J12.5 U12.24
RESET-QFAA12: J13.5 U13.24
RESET-QFAA13: J14.5 U14.24
RESET-QFAA14: J15.5 U15.24
SCK_FLASH: U1.28 U$3.3
SCK_FLASH1: U2.28 U$5.3
SCK_FLASH2: U3.28 U$9.3
SCK_FLASH3: U4.28 U$12.3
SCK_FLASH4: U5.28 U$15.3
SCK_FLASH5: U6.28 U$18.3
SCK_FLASH6: U7.28 U$21.3
SCK_FLASH7: U8.28 U$24.3
SCK_FLASH8: U9.28 U$27.3
SCK_FLASH9: U10.28 U$30.3
SCK_FLASH10: U11.28 U$33.3
SCK_FLASH11: U12.28 U$36.3
SCK_FLASH12: U13.28 U$39.3
SCK_FLASH13: U14.28 U$42.3
SCK_FLASH14: U15.28 U$45.3
SCLK-QFAA: U1.19 U$1.SCLK
SCLK-QFAA1: U2.19 U$2.SCLK
SCLK-QFAA2: U3.19 U$7.SCLK
SCLK-QFAA3: U4.19 U$10.SCLK
SCLK-QFAA4: U5.19 U$13.SCLK
SCLK-QFAA5: U6.19 U$16.SCLK
SCLK-QFAA6: U7.19 U$19.SCLK
SCLK-QFAA7: U8.19 U$22.SCLK
SCLK-QFAA8: U9.19 U$25.SCLK
SCLK-QFAA9: U10.19 U$28.SCLK
SCLK-QFAA10: U11.19 U$31.SCLK
SCLK-QFAA11: U12.19 U$34.SCLK
SCLK-QFAA12: U13.19 U$37.SCLK
SCLK-QFAA13: U14.19 U$40.SCLK
SCLK-QFAA14: U15.19 U$43.SCLK
SI_FLASH: U1.29 U$3.4
SI_FLASH1: U2.29 U$5.4
SI_FLASH2: U3.29 U$9.4
SI_FLASH3: U4.29 U$12.4
SI_FLASH4: U5.29 U$15.4
SI_FLASH5: U6.29 U$18.4
SI_FLASH6: U7.29 U$21.4
SI_FLASH7: U8.29 U$24.4
SI_FLASH8: U9.29 U$27.4
SI_FLASH9: U10.29 U$30.4
SI_FLASH10: U11.29 U$33.4
SI_FLASH11: U12.29 U$36.4
SI_FLASH12: U13.29 U$39.4
SI_FLASH13: U14.29 U$42.4
SI_FLASH14: U15.29 U$45.4
SO_FLASH: U1.39 U$3.6
SO_FLASH1: U2.39 U$5.6
SO_FLASH2: U3.39 U$9.6
SO_FLASH3: U4.39 U$12.6
SO_FLASH4: U5.39 U$15.6
SO_FLASH5: U6.39 U$18.6
SO_FLASH6: U7.39 U$21.6
SO_FLASH7: U8.39 U$24.6
SO_FLASH8: U9.39 U$27.6
SO_FLASH9: U10.39 U$30.6
SO_FLASH10: U11.39 U$33.6
SO_FLASH11: U12.39 U$36.6
SO_FLASH12: U13.39 U$39.6
SO_FLASH13: U14.39 U$42.6
SO_FLASH14: U15.39 U$45.6
SWDCLK-QFAA: J2.2 U1.25
SWDCLK-QFAA1: J1.2 U2.25
SWDCLK-QFAA2: J3.2 U3.25
SWDCLK-QFAA3: J4.2 U4.25
SWDCLK-QFAA4: J5.2 U5.25
SWDCLK-QFAA5: J6.2 U6.25
SWDCLK-QFAA6: J7.2 U7.25
SWDCLK-QFAA7: J8.2 U8.25
SWDCLK-QFAA8: J9.2 U9.25
SWDCLK-QFAA9: J10.2 U10.25
SWDCLK-QFAA10: J11.2 U11.25
SWDCLK-QFAA11: J12.2 U12.25
SWDCLK-QFAA12: J13.2 U13.25
SWDCLK-QFAA13: J14.2 U14.25
SWDCLK-QFAA14: J15.2 U15.25
SWDIO-QFAA: J2.1 U1.26
SWDIO-QFAA1: J1.1 U2.26
SWDIO-QFAA2: J3.1 U3.26
SWDIO-QFAA3: J4.1 U4.26
SWDIO-QFAA4: J5.1 U5.26
SWDIO-QFAA5: J6.1 U6.26
SWDIO-QFAA6: J7.1 U7.26
SWDIO-QFAA7: J8.1 U8.26
SWDIO-QFAA8: J9.1 U9.26
SWDIO-QFAA9: J10.1 U10.26
SWDIO-QFAA10: J11.1 U11.26
SWDIO-QFAA11: J12.1 U12.26
SWDIO-QFAA12: J13.1 U13.26
SWDIO-QFAA13: J14.1 U14.26
SWDIO-QFAA14: J15.1 U15.26
VDD: C3.2 C4.2 C9.2 J2.3 U1.13 U1.36 U1.48
VDD1: C12.2 C13.2 C17.2 J1.3 U2.13 U2.36 U2.48
VDD2: C21.2 C22.2 C26.2 J3.3 U3.13 U3.36 U3.48
VDD3: C30.2 C31.2 C35.2 J4.3 U4.13 U4.36 U4.48
VDD4: C39.2 C40.2 C44.2 J5.3 U5.13 U5.36 U5.48
VDD5: C48.2 C49.2 C53.2 J6.3 U6.13 U6.36 U6.48
VDD6: C57.2 C58.2 C62.2 J7.3 U7.13 U7.36 U7.48
VDD7: C66.2 C67.2 C71.2 J8.3 U8.13 U8.36 U8.48
VDD8: C75.2 C76.2 C80.2 J9.3 U9.13 U9.36 U9.48
VDD9: C84.2 C85.2 C89.2 J10.3 U10.13 U10.36 U10.48
VDD10: C93.2 C94.2 C98.2 J11.3 U11.13 U11.36 U11.48
VDD11: C102.2 C103.2 C107.2 J12.3 U12.13 U12.36 U12.48
VDD12: C111.2 C112.2 C116.2 J13.3 U13.13 U13.36 U13.48
VDD13: C120.2 C121.2 C125.2 J14.3 U14.13 U14.36 U14.48
VDD14: C129.2 C130.2 C134.2 J15.3 U15.13 U15.36 U15.48
WP_FLASH: U1.38 U$3.7
WP_FLASH1: U2.38 U$5.7
WP_FLASH2: U3.38 U$9.7
WP_FLASH3: U4.38 U$12.7
WP_FLASH4: U5.38 U$15.7
WP_FLASH5: U6.38 U$18.7
WP_FLASH6: U7.38 U$21.7
WP_FLASH7: U8.38 U$24.7
WP_FLASH8: U9.38 U$27.7
WP_FLASH9: U10.38 U$30.7
WP_FLASH10: U11.38 U$33.7
WP_FLASH11: U12.38 U$36.7
WP_FLASH12: U13.38 U$39.7
WP_FLASH13: U14.38 U$42.7
WP_FLASH14: U15.38 U$45.7
XC1-QFAA: C7.2 U1.34 U$6.1
XC1-QFAA1: C16.2 U2.34 U$4.1
XC1-QFAA2: C25.2 U3.34 U$8.1
XC1-QFAA3: C34.2 U4.34 U$11.1
XC1-QFAA4: C43.2 U5.34 U$14.1
XC1-QFAA5: C52.2 U6.34 U$17.1
XC1-QFAA6: C61.2 U7.34 U$20.1
XC1-QFAA7: C70.2 U8.34 U$23.1
XC1-QFAA8: C79.2 U9.34 U$26.1
XC1-QFAA9: C88.2 U10.34 U$29.1
XC1-QFAA10: C97.2 U11.34 U$32.1
XC1-QFAA11: C106.2 U12.34 U$35.1
XC1-QFAA12: C115.2 U13.34 U$38.1
XC1-QFAA13: C124.2 U14.34 U$41.1
XC1-QFAA14: C133.2 U15.34 U$44.1
XC2-QFAA: C6.2 U1.35 U$6.3
XC2-QFAA1: C15.2 U2.35 U$4.3
XC2-QFAA2: C24.2 U3.35 U$8.3
XC2-QFAA3: C33.2 U4.35 U$11.3
XC2-QFAA4: C42.2 U5.35 U$14.3
XC2-QFAA5: C51.2 U6.35 U$17.3
XC2-QFAA6: C60.2 U7.35 U$20.3
XC2-QFAA7: C69.2 U8.35 U$23.3
XC2-QFAA8: C78.2 U9.35 U$26.3
XC2-QFAA9: C87.2 U10.35 U$29.3
XC2-QFAA10: C96.2 U11.35 U$32.3
XC2-QFAA11: C105.2 U12.35 U$35.3
XC2-QFAA12: C114.2 U13.35 U$38.3
XC2-QFAA13: C123.2 U14.35 U$41.3
XC2-QFAA14: C132.2 U15.35 U$44.3

## Tracks (layer width: path | path; a pad name or v marks a point on that pad's centre or on a via)
ADXL_POWER-QFAA  (via drill 0.25)
  Top 0.152: U1.10 10.05,6.96 10.4,6.61 v10.71,6.61
  Bottom 0.152: C1.2 10.25,10.94 U$1.VDD/IO 10.86,10.72 10.64,10.51 9.88,10.51 9.79,10.42 9.79,9.2 10.4,9.2 | 10.4,9.2 10.54,9.2 U$1.VS | v10.71,6.61 10.71,7.52 10.4,7.83 10.4,9.2
ADXL_POWER-QFAA1  (via drill 0.25)
  Top 0.152: U2.10 34.05,6.96 34.4,6.61 v34.71,6.61
  Bottom 0.152: C10.2 34.25,10.94 U$2.VDD/IO 34.86,10.72 34.64,10.51 33.88,10.51 33.79,10.42 33.79,9.2 34.4,9.2 | 34.4,9.2 34.54,9.2 U$2.VS | v34.71,6.61 34.71,7.52 34.4,7.83 34.4,9.2
ADXL_POWER-QFAA2  (via drill 0.25)
  Top 0.152: U3.10 58.05,6.96 58.4,6.61 v58.71,6.61
  Bottom 0.152: C19.2 58.25,10.94 U$7.VDD/IO 58.86,10.72 58.64,10.51 57.88,10.51 57.79,10.42 57.79,9.2 58.4,9.2 | 58.4,9.2 58.54,9.2 U$7.VS | v58.71,6.61 58.71,7.52 58.4,7.83 58.4,9.2
ADXL_POWER-QFAA3  (via drill 0.25)
  Top 0.152: U4.10 82.05,6.96 82.4,6.61 v82.71,6.61
  Bottom 0.152: C28.2 82.25,10.94 U$10.VDD/IO 82.86,10.72 82.64,10.51 81.88,10.51 81.79,10.42 81.79,9.2 82.4,9.2 | 82.4,9.2 82.54,9.2 U$10.VS | v82.71,6.61 82.71,7.52 82.4,7.83 82.4,9.2
ADXL_POWER-QFAA4  (via drill 0.25)
  Top 0.152: U5.10 106.05,6.96 106.4,6.61 v106.71,6.61
  Bottom 0.152: C37.2 106.25,10.94 U$13.VDD/IO 106.86,10.72 106.64,10.51 105.88,10.51 105.79,10.42 105.79,9.2 106.4,9.2 | 106.4,9.2 106.54,9.2 U$13.VS | v106.71,6.61 106.71,7.52 106.4,7.83 106.4,9.2
ADXL_POWER-QFAA5  (via drill 0.25)
  Top 0.152: U6.10 10.05,26.96 10.4,26.61 v10.71,26.61
  Bottom 0.152: C46.2 10.25,30.94 U$16.VDD/IO 10.86,30.73 10.64,30.51 9.88,30.51 9.79,30.42 9.79,29.2 10.4,29.2 | 10.4,29.2 10.54,29.2 U$16.VS | v10.71,26.61 10.71,27.52 10.4,27.83 10.4,29.2
ADXL_POWER-QFAA6  (via drill 0.25)
  Top 0.152: U7.10 34.05,26.96 34.4,26.61 v34.71,26.61
  Bottom 0.152: C55.2 34.25,30.94 U$19.VDD/IO 34.86,30.73 34.64,30.51 33.88,30.51 33.79,30.42 33.79,29.2 34.4,29.2 | 34.4,29.2 34.54,29.2 U$19.VS | v34.71,26.61 34.71,27.52 34.4,27.83 34.4,29.2
ADXL_POWER-QFAA7  (via drill 0.25)
  Top 0.152: U8.10 58.05,26.96 58.4,26.61 v58.71,26.61
  Bottom 0.152: C64.2 58.25,30.94 U$22.VDD/IO 58.86,30.73 58.64,30.51 57.88,30.51 57.79,30.42 57.79,29.2 58.4,29.2 | 58.4,29.2 58.54,29.2 U$22.VS | v58.71,26.61 58.71,27.52 58.4,27.83 58.4,29.2
ADXL_POWER-QFAA8  (via drill 0.25)
  Top 0.152: U9.10 82.05,26.96 82.4,26.61 v82.71,26.61
  Bottom 0.152: C73.2 82.25,30.94 U$25.VDD/IO 82.86,30.73 82.64,30.51 81.88,30.51 81.79,30.42 81.79,29.2 82.4,29.2 | 82.4,29.2 82.54,29.2 U$25.VS | v82.71,26.61 82.71,27.52 82.4,27.83 82.4,29.2
ADXL_POWER-QFAA9  (via drill 0.25)
  Top 0.152: U10.10 106.05,26.96 106.4,26.61 v106.71,26.61
  Bottom 0.152: C82.2 106.25,30.94 U$28.VDD/IO 106.86,30.73 106.64,30.51 105.88,30.51 105.79,30.42 105.79,29.2 106.4,29.2 | 106.4,29.2 106.54,29.2 U$28.VS | v106.71,26.61 106.71,27.52 106.4,27.83 106.4,29.2
ADXL_POWER-QFAA10  (via drill 0.25)
  Top 0.152: U11.10 10.05,46.96 10.4,46.61 v10.71,46.61
  Bottom 0.152: C91.2 10.25,50.94 U$31.VDD/IO 10.86,50.73 10.64,50.51 9.88,50.51 9.79,50.42 9.79,49.2 10.4,49.2 | 10.4,49.2 10.54,49.2 U$31.VS | v10.71,46.61 10.71,47.52 10.4,47.83 10.4,49.2
ADXL_POWER-QFAA11  (via drill 0.25)
  Top 0.152: U12.10 34.05,46.96 34.4,46.61 v34.71,46.61
  Bottom 0.152: C100.2 34.25,50.94 U$34.VDD/IO 34.86,50.73 34.64,50.51 33.88,50.51 33.79,50.42 33.79,49.2 34.4,49.2 | 34.4,49.2 34.54,49.2 U$34.VS | v34.71,46.61 34.71,47.52 34.4,47.83 34.4,49.2
ADXL_POWER-QFAA12  (via drill 0.25)
  Top 0.152: U13.10 58.05,46.96 58.4,46.61 v58.71,46.61
  Bottom 0.152: C109.2 58.25,50.94 U$37.VDD/IO 58.86,50.73 58.64,50.51 57.88,50.51 57.79,50.42 57.79,49.2 58.4,49.2 | 58.4,49.2 58.54,49.2 U$37.VS | v58.71,46.61 58.71,47.52 58.4,47.83 58.4,49.2
ADXL_POWER-QFAA13  (via drill 0.25)
  Top 0.152: U14.10 82.05,46.96 82.4,46.61 v82.71,46.61
  Bottom 0.152: C118.2 82.25,50.94 U$40.VDD/IO 82.86,50.73 82.64,50.51 81.88,50.51 81.79,50.42 81.79,49.2 82.4,49.2 | 82.4,49.2 82.54,49.2 U$40.VS | v82.71,46.61 82.71,47.52 82.4,47.83 82.4,49.2
ADXL_POWER-QFAA14  (via drill 0.25)
  Top 0.152: U15.10 106.05,46.96 106.4,46.61 v106.71,46.61
  Bottom 0.152: C127.2 106.25,50.94 U$43.VDD/IO 106.86,50.73 106.64,50.51 105.88,50.51 105.79,50.42 105.79,49.2 106.4,49.2 | 106.4,49.2 106.54,49.2 U$43.VS | v106.71,46.61 106.71,47.52 106.4,47.83 106.4,49.2
CS-QFAA  (via drill 0.25 pad 0.46)
  Top 0.152: U1.21 11.59,11.27 13.54,11.27 13.9,10.91 13.9,10.51 13.62,10.23 v13.62,8.57
  Bottom 0.152: v13.62,8.57 13.62,8.67 U$1.CS
CS-QFAA1  (via drill 0.25 pad 0.46)
  Top 0.152: U2.21 35.59,11.27 37.54,11.27 37.9,10.91 37.9,10.51 37.62,10.23 v37.62,8.57
  Bottom 0.152: v37.62,8.57 37.62,8.67 U$2.CS
CS-QFAA2  (via drill 0.25 pad 0.46)
  Top 0.152: U3.21 59.59,11.27 61.54,11.27 61.9,10.91 61.9,10.51 61.62,10.23 v61.62,8.57
  Bottom 0.152: v61.62,8.57 61.62,8.67 U$7.CS
CS-QFAA3  (via drill 0.25 pad 0.46)
  Top 0.152: U4.21 83.59,11.27 85.54,11.27 85.9,10.91 85.9,10.51 85.62,10.23 v85.62,8.57
  Bottom 0.152: v85.62,8.57 85.62,8.67 U$10.CS
CS-QFAA4  (via drill 0.25 pad 0.46)
  Top 0.152: U5.21 107.59,11.27 109.54,11.27 109.9,10.91 109.9,10.51 109.62,10.23 v109.62,8.57
  Bottom 0.152: v109.62,8.57 109.62,8.67 U$13.CS
CS-QFAA5  (via drill 0.25 pad 0.46)
  Top 0.152: U6.21 11.59,31.27 13.54,31.27 13.9,30.91 13.9,30.51 13.62,30.23 v13.62,28.57
  Bottom 0.152: v13.62,28.57 13.62,28.67 U$16.CS
CS-QFAA6  (via drill 0.25 pad 0.46)
  Top 0.152: U7.21 35.59,31.27 37.54,31.27 37.9,30.91 37.9,30.51 37.62,30.23 v37.62,28.57
  Bottom 0.152: v37.62,28.57 37.62,28.67 U$19.CS
CS-QFAA7  (via drill 0.25 pad 0.46)
  Top 0.152: U8.21 59.59,31.27 61.54,31.27 61.9,30.91 61.9,30.51 61.62,30.23 v61.62,28.57
  Bottom 0.152: v61.62,28.57 61.62,28.67 U$22.CS
CS-QFAA8  (via drill 0.25 pad 0.46)
  Top 0.152: U9.21 83.59,31.27 85.54,31.27 85.9,30.91 85.9,30.51 85.62,30.23 v85.62,28.57
  Bottom 0.152: v85.62,28.57 85.62,28.67 U$25.CS
CS-QFAA9  (via drill 0.25 pad 0.46)
  Top 0.152: U10.21 107.59,31.27 109.54,31.27 109.9,30.91 109.9,30.51 109.62,30.23 v109.62,28.57
  Bottom 0.152: v109.62,28.57 109.62,28.67 U$28.CS
CS-QFAA10  (via drill 0.25 pad 0.46)
  Top 0.152: U11.21 11.59,51.27 13.54,51.27 13.9,50.91 13.9,50.51 13.62,50.23 v13.62,48.58
  Bottom 0.152: v13.62,48.58 13.62,48.67 U$31.CS
CS-QFAA11  (via drill 0.25 pad 0.46)
  Top 0.152: U12.21 35.59,51.27 37.54,51.27 37.9,50.91 37.9,50.51 37.62,50.23 v37.62,48.58
  Bottom 0.152: v37.62,48.58 37.62,48.67 U$34.CS
CS-QFAA12  (via drill 0.25 pad 0.46)
  Top 0.152: U13.21 59.59,51.27 61.54,51.27 61.9,50.91 61.9,50.51 61.62,50.23 v61.62,48.58
  Bottom 0.152: v61.62,48.58 61.62,48.67 U$37.CS
CS-QFAA13  (via drill 0.25 pad 0.46)
  Top 0.152: U14.21 83.59,51.27 85.54,51.27 85.9,50.91 85.9,50.51 85.62,50.23 v85.62,48.58
  Bottom 0.152: v85.62,48.58 85.62,48.67 U$40.CS
CS-QFAA14  (via drill 0.25 pad 0.46)
  Top 0.152: U15.21 107.59,51.27 109.54,51.27 109.9,50.91 109.9,50.51 109.62,50.23 v109.62,48.58
  Bottom 0.152: v109.62,48.58 109.62,48.67 U$43.CS
CS_FLASH  (via drill 0.25)
  Top 0.203: U$3.5 v11.86,14.88 v11.87,14.89 | v12.25,12.53 12.07,12.35 12.07,12.34 11.88,12.15 U1.23
  Bottom 0.203: v11.87,14.89 11.87,12.91 v12.25,12.53
CS_FLASH1  (via drill 0.25)
  Top 0.203: U$5.5 v35.86,14.88 v35.87,14.89 | v36.25,12.53 36.08,12.35 36.08,12.34 35.89,12.15 U2.23
  Bottom 0.203: v35.87,14.89 35.87,12.91 v36.25,12.53
CS_FLASH2  (via drill 0.25)
  Top 0.203: U$9.5 v59.86,14.88 v59.87,14.89 | v60.25,12.53 60.08,12.35 60.08,12.34 59.88,12.15 U3.23
  Bottom 0.203: v59.87,14.89 59.87,12.91 v60.25,12.53
CS_FLASH3  (via drill 0.25)
  Top 0.203: U$12.5 v83.86,14.88 v83.87,14.89 | v84.25,12.53 84.08,12.35 84.08,12.34 83.89,12.15 U4.23
  Bottom 0.203: v83.87,14.89 83.87,12.91 v84.25,12.53
CS_FLASH4  (via drill 0.25)
  Top 0.203: U$15.5 v107.86,14.88 v107.87,14.89 | v108.25,12.53 108.08,12.35 108.08,12.34 107.89,12.15 U5.23
  Bottom 0.203: v107.87,14.89 107.87,12.91 v108.25,12.53
CS_FLASH5  (via drill 0.25)
  Top 0.203: U$18.5 v11.86,34.88 v11.87,34.89 | v12.25,32.53 12.07,32.35 12.07,32.34 11.88,32.15 U6.23
  Bottom 0.203: v11.87,34.89 11.87,32.91 v12.25,32.53
CS_FLASH6  (via drill 0.25)
  Top 0.203: U$21.5 v35.86,34.88 v35.87,34.89 | v36.25,32.53 36.08,32.35 36.08,32.34 35.89,32.15 U7.23
  Bottom 0.203: v35.87,34.89 35.87,32.91 v36.25,32.53
CS_FLASH7  (via drill 0.25)
  Top 0.203: U$24.5 v59.86,34.88 v59.87,34.89 | v60.25,32.53 60.08,32.35 60.08,32.34 59.88,32.15 U8.23
  Bottom 0.203: v59.87,34.89 59.87,32.91 v60.25,32.53
CS_FLASH8  (via drill 0.25)
  Top 0.203: U$27.5 v83.86,34.88 v83.87,34.89 | v84.25,32.53 84.08,32.35 84.08,32.34 83.89,32.15 U9.23
  Bottom 0.203: v83.87,34.89 83.87,32.91 v84.25,32.53
CS_FLASH9  (via drill 0.25)
  Top 0.203: U$30.5 v107.86,34.88 v107.87,34.89 | v108.25,32.53 108.08,32.35 108.08,32.34 107.89,32.15 U10.23
  Bottom 0.203: v107.87,34.89 107.87,32.91 v108.25,32.53
CS_FLASH10  (via drill 0.25)
  Top 0.203: U$33.5 v11.86,54.88 v11.87,54.89 | v12.25,52.53 12.07,52.35 12.07,52.34 11.88,52.15 U11.23
  Bottom 0.203: v11.87,54.89 11.87,52.91 v12.25,52.53
CS_FLASH11  (via drill 0.25)
  Top 0.203: U$36.5 v35.86,54.88 v35.87,54.89 | v36.25,52.53 36.08,52.35 36.08,52.34 35.89,52.15 U12.23
  Bottom 0.203: v35.87,54.89 35.87,52.91 v36.25,52.53
CS_FLASH12  (via drill 0.25)
  Top 0.203: U$39.5 v59.86,54.88 v59.87,54.89 | v60.25,52.53 60.08,52.35 60.08,52.34 59.88,52.15 U13.23
  Bottom 0.203: v59.87,54.89 59.87,52.91 v60.25,52.53
CS_FLASH13  (via drill 0.25)
  Top 0.203: U$42.5 v83.86,54.88 v83.87,54.89 | v84.25,52.53 84.08,52.35 84.08,52.34 83.89,52.15 U14.23
  Bottom 0.203: v83.87,54.89 83.87,52.91 v84.25,52.53
CS_FLASH14  (via drill 0.25)
  Top 0.203: U$45.5 v107.86,54.88 v107.87,54.89 | v108.25,52.53 108.08,52.35 108.08,52.34 107.89,52.15 U15.23
  Bottom 0.203: v107.87,54.89 107.87,52.91 v108.25,52.53
DEC1-QFAA
  Top 0.152: C2.1 6.45,6.91 U1.1
DEC1-QFAA1
  Top 0.152: C11.1 30.45,6.91 U2.1
DEC1-QFAA2
  Top 0.152: C20.1 54.45,6.91 U3.1
DEC1-QFAA3
  Top 0.152: C29.1 78.45,6.91 U4.1
DEC1-QFAA4
  Top 0.152: C38.1 102.45,6.91 U5.1
DEC1-QFAA5
  Top 0.152: C47.1 6.45,26.91 U6.1
DEC1-QFAA6
  Top 0.152: C56.1 30.45,26.91 U7.1
DEC1-QFAA7
  Top 0.152: C65.1 54.45,26.91 U8.1
DEC1-QFAA8
  Top 0.152: C74.1 78.45,26.91 U9.1
DEC1-QFAA9
  Top 0.152: C83.1 102.45,26.91 U10.1
DEC1-QFAA10
  Top 0.152: C92.1 6.45,46.91 U11.1
DEC1-QFAA11
  Top 0.152: C101.1 30.45,46.91 U12.1
DEC1-QFAA12
  Top 0.152: C110.1 54.45,46.91 U13.1
DEC1-QFAA13
  Top 0.152: C119.1 78.45,46.91 U14.1
DEC1-QFAA14
  Top 0.152: C128.1 102.45,46.91 U15.1
DEC3-QFAA
  Top 0.152: U1.33 7.65,13.87 C5.1
DEC3-QFAA1
  Top 0.152: U2.33 31.65,13.87 C14.1
DEC3-QFAA2
  Top 0.152: U3.33 55.65,13.87 C23.1
DEC3-QFAA3
  Top 0.152: U4.33 79.65,13.87 C32.1
DEC3-QFAA4
  Top 0.152: U5.33 103.65,13.87 C41.1
DEC3-QFAA5
  Top 0.152: U6.33 7.65,33.87 C50.1
DEC3-QFAA6
  Top 0.152: U7.33 31.65,33.87 C59.1
DEC3-QFAA7
  Top 0.152: U8.33 55.65,33.87 C68.1
DEC3-QFAA8
  Top 0.152: U9.33 79.65,33.87 C77.1
DEC3-QFAA9
  Top 0.152: U10.33 103.65,33.87 C86.1
DEC3-QFAA10
  Top 0.152: U11.33 7.65,53.87 C95.1
DEC3-QFAA11
  Top 0.152: U12.33 31.65,53.87 C104.1
DEC3-QFAA12
  Top 0.152: U13.33 55.65,53.87 C113.1
DEC3-QFAA13
  Top 0.152: U14.33 79.65,53.87 C122.1
DEC3-QFAA14
  Top 0.152: U15.33 103.65,53.87 C131.1
DEC4-QFAA
  Top 0.152: 5.78,8.94 U1.46 5.72,9.02 5.37,9.02 5.24,9.15 5.24,9.19 C8.1
DEC4-QFAA1
  Top 0.152: 29.78,8.94 U2.46 29.72,9.02 29.37,9.02 29.24,9.15 29.24,9.19 C18.1
DEC4-QFAA2
  Top 0.152: 53.78,8.94 U3.46 53.72,9.02 53.37,9.02 53.24,9.15 53.24,9.19 C27.1
DEC4-QFAA3
  Top 0.152: 77.78,8.94 U4.46 77.72,9.02 77.37,9.02 77.24,9.15 77.24,9.19 C36.1
DEC4-QFAA4
  Top 0.152: 101.78,8.94 U5.46 101.72,9.02 101.37,9.02 101.24,9.15 101.24,9.19 C45.1
DEC4-QFAA5
  Top 0.152: 5.78,28.94 U6.46 5.72,29.02 5.37,29.02 5.24,29.15 5.24,29.19 C54.1
DEC4-QFAA6
  Top 0.152: 29.78,28.94 U7.46 29.72,29.02 29.37,29.02 29.24,29.15 29.24,29.19 C63.1
DEC4-QFAA7
  Top 0.152: 53.78,28.94 U8.46 53.72,29.02 53.37,29.02 53.24,29.15 53.24,29.19 C72.1
DEC4-QFAA8
  Top 0.152: 77.78,28.94 U9.46 77.72,29.02 77.37,29.02 77.24,29.15 77.24,29.19 C81.1
DEC4-QFAA9
  Top 0.152: 101.78,28.94 U10.46 101.72,29.02 101.37,29.02 101.24,29.15 101.24,29.19 C90.1
DEC4-QFAA10
  Top 0.152: 5.78,48.94 U11.46 5.72,49.02 5.37,49.02 5.24,49.15 5.24,49.19 C99.1
DEC4-QFAA11
  Top 0.152: 29.78,48.94 U12.46 29.72,49.02 29.37,49.02 29.24,49.15 29.24,49.19 C108.1
DEC4-QFAA12
  Top 0.152: 53.78,48.94 U13.46 53.72,49.02 53.37,49.02 53.24,49.15 53.24,49.19 C117.1
DEC4-QFAA13
  Top 0.152: 77.78,48.94 U14.46 77.72,49.02 77.37,49.02 77.24,49.15 77.24,49.19 C126.1
DEC4-QFAA14
  Top 0.152: 101.78,48.94 U15.46 101.72,49.02 101.37,49.02 101.24,49.15 101.24,49.19 C135.1
FLASH_POWER  (via drill 0.25)
  Top 0.203: U$3.1 12.16,14.38 v12.41,14.12 | v13.22,12.09 12.88,11.75 U1.22
  Bottom 0.203: v12.41,14.12 13.22,13.32 v13.22,12.09
FLASH_POWER1  (via drill 0.25)
  Top 0.203: U$5.1 36.16,14.38 v36.41,14.12 | v37.22,12.09 36.88,11.75 U2.22
  Bottom 0.203: v36.41,14.12 37.22,13.32 v37.22,12.09
FLASH_POWER2  (via drill 0.25)
  Top 0.203: U$9.1 60.16,14.38 v60.41,14.12 | v61.22,12.09 60.88,11.75 U3.22
  Bottom 0.203: v60.41,14.12 61.22,13.32 v61.22,12.09
FLASH_POWER3  (via drill 0.25)
  Top 0.203: U$12.1 84.16,14.38 v84.42,14.12 | v85.22,12.09 84.88,11.75 U4.22
  Bottom 0.203: v84.42,14.12 85.22,13.32 v85.22,12.09
FLASH_POWER4  (via drill 0.25)
  Top 0.203: U$15.1 108.16,14.38 v108.42,14.12 | v109.22,12.09 108.88,11.75 U5.22
  Bottom 0.203: v108.42,14.12 109.22,13.32 v109.22,12.09
FLASH_POWER5  (via drill 0.25)
  Top 0.203: U$18.1 12.16,34.38 v12.41,34.12 | v13.22,32.09 12.88,31.75 U6.22
  Bottom 0.203: v12.41,34.12 13.22,33.32 v13.22,32.09
FLASH_POWER6  (via drill 0.25)
  Top 0.203: U$21.1 36.16,34.38 v36.41,34.12 | v37.22,32.09 36.88,31.75 U7.22
  Bottom 0.203: v36.41,34.12 37.22,33.32 v37.22,32.09
FLASH_POWER7  (via drill 0.25)
  Top 0.203: U$24.1 60.16,34.38 v60.41,34.12 | v61.22,32.09 60.88,31.75 U8.22
  Bottom 0.203: v60.41,34.12 61.22,33.32 v61.22,32.09
FLASH_POWER8  (via drill 0.25)
  Top 0.203: U$27.1 84.16,34.38 v84.42,34.12 | v85.22,32.09 84.88,31.75 U9.22
  Bottom 0.203: v84.42,34.12 85.22,33.32 v85.22,32.09
FLASH_POWER9  (via drill 0.25)
  Top 0.203: U$30.1 108.16,34.38 v108.42,34.12 | v109.22,32.09 108.88,31.75 U10.22
  Bottom 0.203: v108.42,34.12 109.22,33.32 v109.22,32.09
FLASH_POWER10  (via drill 0.25)
  Top 0.203: U$33.1 12.16,54.38 v12.41,54.12 | v13.22,52.09 12.88,51.75 U11.22
  Bottom 0.203: v12.41,54.12 13.22,53.32 v13.22,52.09
FLASH_POWER11  (via drill 0.25)
  Top 0.203: U$36.1 36.16,54.38 v36.41,54.12 | v37.22,52.09 36.88,51.75 U12.22
  Bottom 0.203: v36.41,54.12 37.22,53.32 v37.22,52.09
FLASH_POWER12  (via drill 0.25)
  Top 0.203: U$39.1 60.16,54.38 v60.41,54.12 | v61.22,52.09 60.88,51.75 U13.22
  Bottom 0.203: v60.41,54.12 61.22,53.32 v61.22,52.09
FLASH_POWER13  (via drill 0.25)
  Top 0.203: U$42.1 84.16,54.38 v84.42,54.12 | v85.22,52.09 84.88,51.75 U14.22
  Bottom 0.203: v84.42,54.12 85.22,53.32 v85.22,52.09
FLASH_POWER14  (via drill 0.25)
  Top 0.203: U$45.1 108.16,54.38 v108.42,54.12 | v109.22,52.09 108.88,51.75 U15.22
  Bottom 0.203: v108.42,54.12 109.22,53.32 v109.22,52.09
GND  (via drill 0.25, 0.25 pad 0.46, 0.25 pad 0.51, 0.5, 0.5 pad 0.46)
  Top 0.152: 8.41,10.12 8.45,10.15 8.45,10.55 U1.EP v8.4,10.1 | v8.4,10.1 6.89,8.59 v6.74,8.59 | v7.5,8.59 v8.27,8.59 | C3.1 7.84,6.48 v7.95,6.37 | C4.1 6.74,6.76 6.74,6.67 6.58,6.51 v6.58,6.35 | C2.2 5.96,6.4 v5.91,6.35 | C5.2 8.17,13.96 v8.75,13.96 | C7.1 8.74,14.74 v8.8,14.69 | U$3.8 9.01,15.45 v8.89,15.45 | C6.1 4.59,12.05 v4.46,11.92 | 8.45,12.5 8.4,12.45 v8.4,10.1 | C8.2 4.5,9.95 v4.35,10.1
  Top 0.203: C9.1 v4.42,6.48 | v9.08,8.54 v9.08,9.3 | v8.32,9.3 8.27,9.35 v7.56,9.35 | v6.79,9.35 7.79,10.35 U1.EP 6.79,12.2 v6.79,12.35
  Top 0.254: U1.31 8.45,12.5 8.45,10.55 | U1.45 v6.79,9.35 v7.56,9.35 7.65,9.35 v8.4,10.1 8.41,10.12 U1.EP
  Bottom 0.152: C1.1 10,11.65 v10,12 | U$1.GND@2 U$1.GND@1 | U$1.GND@1 11.36,7.04 v11.68,6.72 | v6.74,8.59 v7.5,8.59 | U$1.GND@1 11.36,9.92 11.12,10.16 U$1.GND@3
  Bottom 0.203: v8.27,8.59 9.03,8.59 v9.08,8.54 | v9.08,9.3 v8.32,9.3 | v6.79,12.35 v6.79,11.59
  Bottom 0.305: J2.4 15.53,14.27 v13.43,14.27
  pour Route10: 4,16 4,6 14,6 14,16
GND1  (via drill 0.25, 0.25 pad 0.46, 0.25 pad 0.51, 0.5, 0.5 pad 0.46)
  Top 0.152: 32.41,10.12 32.45,10.15 32.45,10.55 U2.EP v32.4,10.1 | v32.4,10.1 30.89,8.59 v30.74,8.59 | v31.5,8.59 v32.27,8.59 | C12.1 31.84,6.48 v31.95,6.37 | C13.1 30.74,6.76 30.74,6.67 30.58,6.51 v30.58,6.35 | C11.2 29.96,6.4 v29.91,6.35 | C14.2 32.17,13.96 v32.75,13.96 | C16.1 32.74,14.74 v32.8,14.69 | U$5.8 33.01,15.45 v32.89,15.45 | C15.1 28.59,12.05 v28.45,11.92 | 32.45,12.5 32.4,12.45 v32.4,10.1 | C18.2 28.5,9.95 v28.35,10.1
  Top 0.203: C17.1 v28.41,6.48 v28.42,6.48 | v33.08,8.54 v33.08,9.3 | v32.32,9.3 32.27,9.35 v31.56,9.35 | v30.79,9.35 31.79,10.35 U2.EP 30.79,12.2 v30.79,12.35
  Top 0.254: U2.31 32.45,12.5 32.45,10.55 | U2.45 v30.79,9.35 v31.56,9.35 31.65,9.35 v32.4,10.1 32.41,10.12 U2.EP
  Bottom 0.152: C10.1 34,11.65 v34,12 | U$2.GND@2 U$2.GND@1 | U$2.GND@1 35.36,7.04 v35.68,6.72 | v30.74,8.59 v31.5,8.59 | U$2.GND@1 35.36,9.92 35.12,10.16 U$2.GND@3
  Bottom 0.203: v32.27,8.59 33.03,8.59 v33.08,8.54 | v33.08,9.3 v32.32,9.3 | v30.79,12.35 v30.79,11.59
  Bottom 0.305: J1.4 39.53,14.27 v37.42,14.27
  pour Route10: 28,16 28,6 38,6 38,16
GND2  (via drill 0.25, 0.25 pad 0.46, 0.25 pad 0.51, 0.5, 0.5 pad 0.46)
  Top 0.152: 56.41,10.12 56.45,10.15 56.45,10.55 U3.EP v56.4,10.1 | v56.4,10.1 54.89,8.59 v54.74,8.59 | v55.51,8.59 v56.27,8.59 | C21.1 55.84,6.48 v55.95,6.37 | C22.1 54.74,6.76 54.74,6.67 54.58,6.51 v54.58,6.35 | C20.2 53.96,6.4 v53.91,6.35 | C23.2 56.17,13.96 v56.75,13.96 | C25.1 56.74,14.74 v56.8,14.69 | U$9.8 57.01,15.45 v56.89,15.45 | C24.1 52.59,12.05 v52.45,11.92 | 56.45,12.5 56.4,12.45 v56.4,10.1 | C27.2 52.5,9.95 v52.35,10.1
  Top 0.203: C26.1 v52.41,6.48 v52.42,6.48 | v57.08,8.54 v57.08,9.3 | v56.32,9.3 56.27,9.35 v55.56,9.35 | v54.79,9.35 55.79,10.35 U3.EP 54.79,12.2 v54.79,12.35
  Top 0.254: U3.31 56.45,12.5 56.45,10.55 | U3.45 v54.79,9.35 v55.56,9.35 55.65,9.35 v56.4,10.1 56.41,10.12 U3.EP
  Bottom 0.152: C19.1 58,11.65 v58,12 | U$7.GND@2 U$7.GND@1 | U$7.GND@1 59.36,7.04 v59.68,6.72 | v54.74,8.59 v55.51,8.59 | U$7.GND@1 59.36,9.92 59.12,10.16 U$7.GND@3
  Bottom 0.203: v56.27,8.59 57.03,8.59 v57.08,8.54 | v57.08,9.3 v56.32,9.3 | v54.79,12.35 v54.79,11.59
  Bottom 0.305: J3.4 63.53,14.27 v61.42,14.27
  pour Route10: 52,16 52,6 62,6 62,16
GND3  (via drill 0.25, 0.25 pad 0.46, 0.25 pad 0.51, 0.5, 0.5 pad 0.46)
  Top 0.152: 80.42,10.12 80.45,10.15 80.45,10.55 U4.EP v80.4,10.1 | v80.4,10.1 78.89,8.59 v78.74,8.59 | v79.5,8.59 v80.27,8.59 | C30.1 79.84,6.48 v79.95,6.37 | C31.1 78.74,6.76 78.74,6.67 78.58,6.51 v78.58,6.35 | C29.2 77.96,6.4 v77.91,6.35 | C32.2 80.17,13.96 v80.75,13.96 | C34.1 80.74,14.74 v80.8,14.69 | U$12.8 81.01,15.45 v80.89,15.45 | C33.1 76.59,12.05 v76.45,11.92 | 80.45,12.5 80.4,12.45 v80.4,10.1 | C36.2 76.5,9.95 v76.35,10.1
  Top 0.203: C35.1 v76.42,6.48 | v81.08,8.54 v81.08,9.3 | v80.32,9.3 80.27,9.35 v79.56,9.35 | v78.79,9.35 79.79,10.35 U4.EP 78.79,12.2 v78.79,12.35
  Top 0.254: U4.31 80.45,12.5 80.45,10.55 | U4.45 v78.79,9.35 v79.56,9.35 79.65,9.35 v80.4,10.1 80.42,10.12 U4.EP
  Bottom 0.152: C28.1 82,11.65 v82,12 | U$10.GND@2 U$10.GND@1 | U$10.GND@1 83.36,7.04 v83.68,6.72 | v78.74,8.59 v79.5,8.59 | U$10.GND@1 83.36,9.92 83.12,10.16 U$10.GND@3
  Bottom 0.203: v80.27,8.59 81.03,8.59 v81.08,8.54 | v81.08,9.3 v80.32,9.3 | v78.79,12.35 v78.79,11.59
  Bottom 0.305: J4.4 87.53,14.27 v85.42,14.27
  pour Route10: 76,16 76,6 86,6 86,16
GND4  (via drill 0.25, 0.25 pad 0.46, 0.25 pad 0.51, 0.5, 0.5 pad 0.46)
  Top 0.152: 104.42,10.12 104.45,10.15 104.45,10.55 U5.EP v104.4,10.1 | v104.4,10.1 102.89,8.59 v102.74,8.59 | v103.5,8.59 v104.27,8.59 | C39.1 103.84,6.48 v103.95,6.37 | C40.1 102.74,6.76 102.74,6.67 102.58,6.51 v102.58,6.35 | C38.2 101.96,6.4 v101.91,6.35 | C41.2 104.17,13.96 v104.75,13.96 | C43.1 104.74,14.74 v104.8,14.69 | U$15.8 105.01,15.45 v104.89,15.45 | C42.1 100.59,12.05 v100.45,11.92 | 104.45,12.5 104.4,12.45 v104.4,10.1 | C45.2 100.5,9.95 v100.35,10.1
  Top 0.203: C44.1 v100.42,6.48 | v105.08,8.54 v105.08,9.3 | v104.32,9.3 104.27,9.35 v103.56,9.35 | v102.79,9.35 103.79,10.35 U5.EP 102.79,12.2 v102.79,12.35
  Top 0.254: U5.31 104.45,12.5 104.45,10.55 | U5.45 v102.79,9.35 v103.56,9.35 103.65,9.35 v104.4,10.1 104.42,10.12 U5.EP
  Bottom 0.152: C37.1 106,11.65 v106,12 | U$13.GND@2 U$13.GND@1 | U$13.GND@1 107.36,7.04 v107.68,6.72 | v102.74,8.59 v103.5,8.59 | U$13.GND@1 107.36,9.92 107.12,10.16 U$13.GND@3